# Altium PCB Soil_Moisture_Sensor - 副本.PcbDoc
Units mm, origin at the board's own origin, x right, y up, seen from the top; angles counter-clockwise.
Board outline 188.16 x 66 mm, 2 copper layers (Top Layer, Bottom Layer); 84 components, 58 nets, 298 pads, 19 vias.
Unrouted connection lines stored in the file: 207.
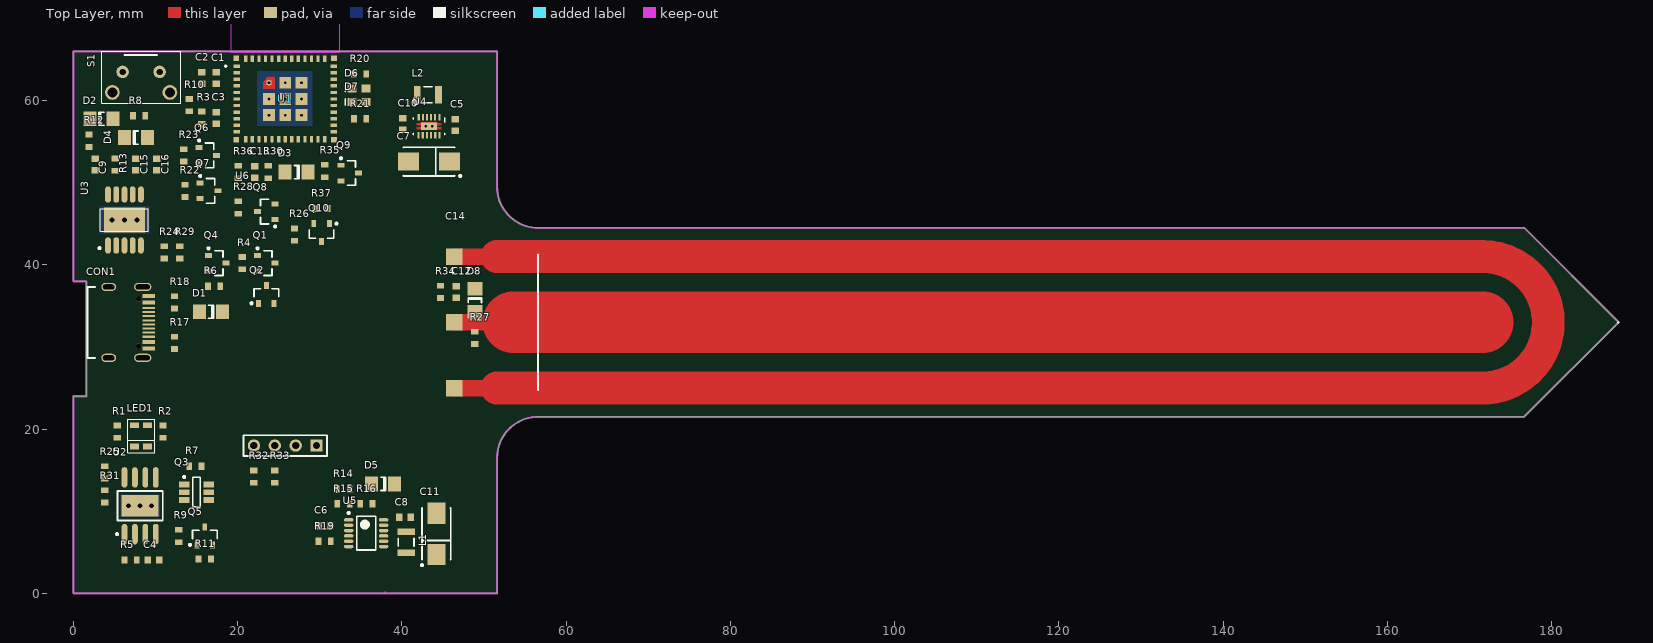
[diagram p0: Top Layer view]
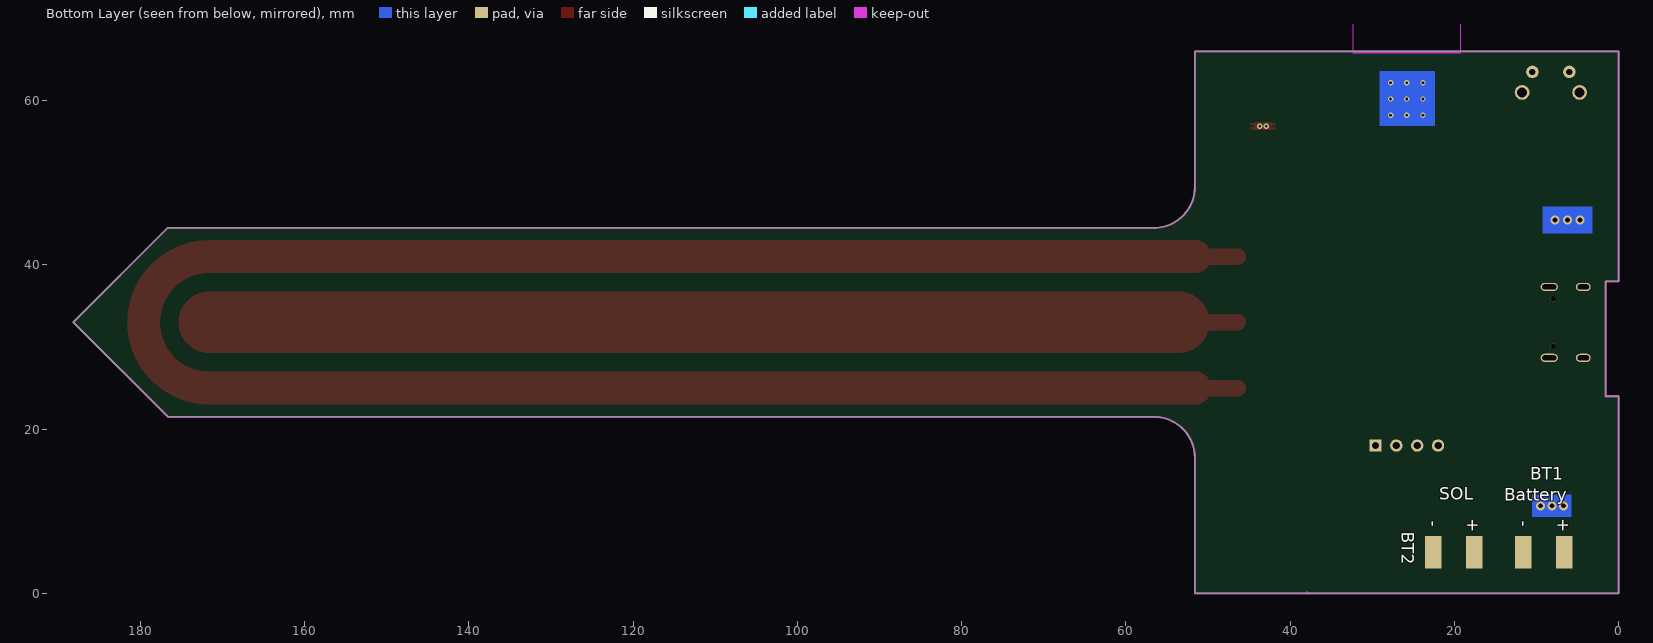
[diagram p1: Bottom Layer view, seen from below]

## Layer stack, top to bottom
Top Solder: solder mask 0.0102, Solder Resist, Dk 3.5
Top Layer: signal copper 0.0356
Dielectric 1: dielectric 0.32, FR-4, Dk 4.8
Bottom Layer: signal copper 0.0356
Bottom Solder: solder mask 0.0102, Solder Resist, Dk 3.5

## Board outline
0,0 0,24 1.6,24 1.6,38 0,38 0,66 51.6,66 51.6,49.5 ccw(c56.6,49.5) 56.6,44.5 176.683,44.5 188.163,33.02 176.643,21.5 176.6,21.5 56.6,21.5 ccw(c56.6,16.5) 51.6,16.5 51.6,0

## Design rules (kind name [scope] priority, off if disabled: settings)
Clearance Clearance_1 [HasFootprint('USB-TYPE_C')] p1: gap=0.1 ignorepadtopadclearanceinfootprint=TRUE
Clearance DSS0012A [HasFootprint('DSS0012A')] p2: gap=0.2 ignorepadtopadclearanceinfootprint=TRUE
Clearance [All] p3: gap=0.254 ignorepadtopadclearanceinfootprint=TRUE
ComponentClearance [All] p1: gap=0.254 collisioncheckmode=3 verticalgap=2540 showdistances=FALSE donotcheckwithout3dbody=TRUE
PolygonConnect [All] p1: connectstyle=Relief reliefconductorwidth=0.254 reliefentries=4 polygonreliefangle="90 Angle" airgapwidth=0.254
RoutingLayers RoutingLayers_EX_GND [InNet('GND')] p1: top layer_v5=FALSE bottom layer_v5=FALSE
RoutingLayers [All] p2: top layer_v5=TRUE bottom layer_v5=TRUE
RoutingVias [All] p1: holewidth=0.33 width=0.61 viastyle="Through Hole" minholewidth=0.33 minwidth=0.61 maxholewidth=0.33 maxwidth=0.61
SolderMaskExpansion [All] p1: expansion=0.102 istentingtop=FALSE
SupplyNets "Schematic Supply Nets_5" [InNet('GND')] p1: voltage=0.000
SupplyNets "Schematic Supply Nets_4" [InNet('GPIO10')] p2: voltage=0.000
SupplyNets "Schematic Supply Nets_3" [InNet('VIN')] p3: voltage=0.000
SupplyNets "Schematic Supply Nets_2" [InNet('VBAT')] p4: voltage=0.000
SupplyNets "Schematic Supply Nets_1" [InNet('VMCU')] p5: voltage=0.000
SupplyNets "Schematic Supply Nets" [InNet('VBUS')] p6: voltage=0.000
Width [All] p1: maxlimit=85 minlimit=0.254 preferedwidth=0.254
28 further rules are at their usual default settings.

## Components (designator, comment, footprint, x,y, rotation, side; value= is the part's Value field where it differs from the comment)
BT1 "Battery" BATTERY 26.6,33 r270 bottom
BT2 "SOL-Battery" BATTERY-SOL 26.6,33 r270 bottom
C1 "25V" CAPC1608L 17.399,62.738 r270 top value=106
C2 "50V" CAPC1608L 15.621,62.738 r270 top value=104
C3 "16V" CAPC1608L 17.399,57.9 r90 top value=105
C4 "25V" CAPC1608L 9.779,4.064 r0 top value=106
C5 "25V" CAPC1608L 46.482,57.023 r270 top value=106
C6 "25V" CAPC1608L 30.607,8.255 r180 top value=475
C7 "16V" TC6032-2412 43.307,52.578 r180 top value=107
C8 "25V" CAPC1608L 40.386,9.271 r0 top value=105
C9 "50V" CAPC1608L 2.667,52.197 r270 top value=104
C10 "25V" CAPC1608L 40.132,57.15 r270 top value=106
C11 "16V" TC6032-2412 44.196,7.239 r90 top value=107
C12 "50V" CAPC1608L 46.609,36.703 r270 top value=104
C13 "50V" CAPC1608L 22.098,51.308 r90 top value=104
C14 "CAP-SENSOR" CAP-SENSOR 51.6,33 r90 top locked
C15 "25V" CAPC1608L 7.62,52.197 r90 top value=106
C16 "50V" CAPC1608L 10.16,52.197 r90 top value=104
CON1 "USB-TYPEE_C" USB-TYPE_C 9,33 r270 top locked
D1 "1N4148" CD3216-1206 16.764,34.29 r0 top
D2 "1N4148" CD3216-1206 3.429,57.785 r180 top
D3 "1N4148" CD3216-1206 27.178,51.308 r0 top
D4 "1N4148" CD3216-1206 7.62,55.499 r180 top
D5 "1N4148" CD3216-1206 37.719,13.335 r0 top
D6 "Green" CD1608-0603 34.798,61.468 r180 top
D7 "Blue" CD1608-0603 34.798,59.817 r180 top
D8 "1N4148" CD3216-1206 48.895,35.687 r90 top
L1 "2A" INDC2520X06N 40.513,6.223 r270 top value=10uH
L2 "2A" INDC2520X06N 43.18,60.706 r0 top value=2.2uH
LED1 "RED_GREEN_LED" RED_GREEN_LED1206 8.255,19.177 r90 top
Q1 "AO3401,A19T" SOT-23B_L 23.495,40.209 r0 top
Q2 "AO3401,A19T" SOT-23B_L 23.495,36.399 r90 top
Q3 "AO6801" SOT95P330-6M 14.986,12.319 r0 top
Q4 "AO3400,A09T" SOT-23B_L 17.526,40.209 r0 top
Q5 "S8050,J3Y" SOT-23B_L 16.002,6.985 r90 top
Q6 "S8050,J3Y" SOT-23B_L 16.383,53.34 r0 top
Q7 "S8050,J3Y" SOT-23B_L 16.51,49.022 r0 top
Q8 "AO3401,A19T" SOT-23B_L 23.495,46.482 r180 top
Q9 "AO3401,A19T" SOT-23B_L 33.655,51.181 r0 top
Q10 "AO3400,A09T" SOT-23B_L 30.226,43.942 r270 top
R1 "Res1" RESC1608L 5.334,19.685 r270 top value=1K
R2 "Res1" RESC1608L 10.922,19.685 r270 top value=1K
R3 "Res1" RESC1608L 15.621,57.912 r270 top value=10K
R4 "" RESC1608L 20.574,40.209 r270 top value=1M
R5 "Res1" RESC1608L 6.985,4.064 r0 top value=1.2K
R6 "" RESC1608L 17.145,37.415 r0 top value=10K
R7 "" RESC1608L 14.859,15.494 r180 top value=10K
R8 "" RESC1608L 8.001,58.166 r180 top value=3.6K
R9 "" RESC1608L 12.827,6.985 r90 top value=4.7K
R10 "" RESC1608L 14.097,59.45 r90 top value=10K
R11 "" RESC1608L 16.002,4.191 r0 top value=10K
R12 "" RESC1608L 1.905,55.118 r90 top value=1M
R13 "Res1" RESC1608L 5.08,52.197 r270 top value=300R
R14 "" RESC1608L 32.893,12.7 r0 top value=330K
R15 "" RESC1608L 32.893,10.922 r0 top value=270K
R16 "" RESC1608L 35.687,10.922 r0 top value=1M
R17 "Res1" RESC1608L 12.319,30.5 r90 top value=5.1K
R18 "Res1" RESC1608L 12.319,35.433 r270 top value=5.1K
R19 "" RESC1608L 30.607,6.35 r0 top value=240K
R20 "Res1" RESC1608L 34.925,63.246 r0 top value=1K
R21 "Res1" RESC1608L 34.925,57.785 r0 top value=1K
R22 "Res1" RESC1608L 13.589,49.022 r270 top value=10K
R23 "Res1" RESC1608L 13.462,53.34 r270 top value=10K
R24 "" RESC1608L 11.049,41.529 r270 top value=3.6K
R25 "" RESC1608L 3.81,14.732 r90 top value=36K
R26 "" RESC1608L 26.924,43.688 r90 top value=10K
R27 "" RESC1608L 48.895,31.115 r270 top value=10K
R28 "" RESC1608L 20.066,46.99 r270 top value=10K
R29 "" RESC1608L 12.954,41.529 r90 top value=10K
R30 "" RESC1608L 23.749,51.308 r90 top value=1M
R31 "" RESC1608L 3.81,11.811 r90 top value=100K
R32 "Res1" RESC1608L 21.99,14.224 r90 top value=10K
R33 "Res1" RESC1608L 24.53,14.224 r90 top value=10K
R34 "" RESC1608L 44.704,36.703 r270 top value=1M
R35 "" RESC1608L 30.607,51.435 r270 top value=10K
R36 "" RESC1608L 20.066,51.308 r90 top value=10K
R37 "" RESC1608L 30.226,46.863 r0 top value=10K
S1 "Key" KEY 8.255,63.5 r0 top locked
U1 "ESP32-C3-MINI-1" XCVR_ESP32-C3-MINI-1-N4 25.8,60.2 r0 top locked
U2 "TP4056" SOP127P780-8M 8.128,10.668 r90 top
U3 "CH340K" ESOP100-10 6.223,45.466 r90 top
U4 "TPS62740" DSS0012A 43.307,56.896 r270 top
U5 "LTC3105" TSOP65P490X110-12L 35.653,7.325 r0 top
U6 "*OLED-128-32" OLED-128-32 25.8,18 r180 top locked

## Footprints (in the part's own frame and the unit in brackets; to place one, negate y for a bottom-side part, rotate by r counter-clockwise, add the part's x,y. Pads: shape width x height; smd on the part's side, far side on the other; paste and mask are expansions set on the pad)
BATTERY [mm] "BATTERY"
  rect 4x2 smd: 1(28,20) 2(28,15)
BATTERY-SOL [mm] "BATTERY"
  rect 4x2 smd: 1(28,9) 2(28,4)
CAP-SENSOR [mm] "CAP-SENSOR"
  rect 2x2 smd: 1(-8,5.2) 2(8,5.2) 3(0,5.2)
  Top Layer lines w2: -8,5.2 -8,0 ; 0,5.2 0,0 ; 8,5.2 8,0
  Top Layer lines w4: -8,0 -8,-120 ccw(c0,-120) 8,-120 8,0
  Top Layer lines w7.5: 0,-2 0,-120
  silkscreen extent -8.25,-136.53 8.25,-5
CAPC1608L [mm] "Chip Capacitor, Body 1.6x0.8mm, IPC High Density"
  rect 0.8x0.9 smd: 1(-0.7,0) 2(0.7,0)
  body extent -0.87,-0.48 0.87,0.48, height 0.85
CD1608-0603 [mm] "Chip Diode; Body 1.6 x 0.8 mm (LxW typ)"
  rect 1.1x1 smd: 1(-0.85,0) 2(0.85,0)
  silkscreen extent 1.7,-0.4 1.7,0.4
CD3216-1206 [mm] "Chip Diode; Body 3.2 x 1.6 mm (LxW typ)"
  rect 1.6x1.8 smd: 1(-1.4,0) 2(1.4,0)
  silkscreen extent -0.3,-0.8 0.3,0.8
DSS0012A [mm]
  rect 0.8x0.25 smd paste+0 mask+0.051: 1(-1.1,1.27) 2(-1.1,0.75) 3(-1.1,0.25) 4(-1.1,-0.25) 5(-1.1,-0.75) 6(-1.1,-1.25) 7(1.1,-1.27) 8(1.1,-0.762) 9(1.1,-0.254) 10(1.1,0.254) 11(1.1,0.762) 12(1.1,1.25)
  rect 0.9x2 smd paste-0.45 mask+0.051: 13(0,0)
  Top Layer region: -0.125,-1.5 -0.375,-1.5 -0.375,-1 -0.45,-1 -0.45,1 -0.375,1 -0.375,1.5 -0.125,1.5 -0.125,1 0.125,1 0.125,1.5 0.375,1.5 0.375,1 0.45,1 0.45,-1 0.375,-1 0.375,-1.5 0.125,-1.5 0.125,-1 -0.125,-1
  silkscreen extent -1.03,-1.91 1.04,1.91
ESOP100-10 [mm] "10-Pin Small Outline Package 1.00 mm Pitch and Pad"
  rect 3x5 smd: 0(0,0)
  oval 2x0.7 smd: 1(-3.1,2) 2(-3.1,1) 3(-3.1,0) 4(-3.1,-1) 5(-3.1,-2) 6(3.1,-2) 7(3.1,-1) 8(3.1,0) 9(3.1,1) 10(3.1,2)
  Bottom Layer region: -1.651,-3.048 1.651,-3.048 1.651,3.048 -1.651,3.048
  silkscreen extent -3.55,-2.92 1.4,3.17, body extent -2.85,-3.17 2.85,3.43, height 2.2
INDC2520X06N [mm] "Chip Inductor, 2-Leads, Body 2.50x2.00mm, IPC Medium Density"
  rect 0.8x2.14 smd: 1(-1.28,0) 2(1.28,0)
  silkscreen extent -0.5,-0.97 0.5,0.97, body extent -1.25,-1 1.25,1, height 0.6
KEY [mm]
  round 1.8 hole 1.2: 0(-3.5,-2.5) 0(3.5,-2.5)
  round 1.524 hole 0.762: 1(2.25,-0.007) 2(-2.25,0)
  silkscreen extent -4.83,-3.81 4.83,2.5
OLED-128-32 [mm]
  rect 1.5x1.5 hole 0.9: 1(-3.81,0)
  round 1.5 hole 0.9: 2(-1.27,0) 3(1.27,0) 4(3.81,0)
  silkscreen extent -5.08,-1.27 5.08,1.27
RED_GREEN_LED1206 [mm]
  rect 0.7x1.1 smd: 1(-1.3,0.8) 2(-1.3,-0.8) 3(1.3,-0.8) 4(1.3,0.8)
  silkscreen extent -2.03,-1.65 2.03,1.65
RESC1608L [mm] "Chip Resistor, Body 1.6x0.8mm, IPC High Density"
  rect 0.7x0.9 smd: 1(-0.75,0) 2(0.75,0)
  body extent -0.85,-0.48 0.85,0.48, height 0.6
SOP127P780-8M [mm] "SOP, 8-Leads, Body 5.3x5.3mm, Pitch 1.27mm, IPC Low Density"
  oval 2.5x0.7 smd: 1(-3.45,1.905) 2(-3.45,0.635) 3(-3.45,-0.635) 4(-3.45,-1.905) 5(3.45,-1.905) 6(3.45,-0.635) 7(3.45,0.635) 8(3.45,1.905)
  rect 2.6x4.5 smd: 9(0,0)
  Bottom Layer region: -1.397,-2.413 1.397,-2.413 1.397,2.413 -1.397,2.413
  silkscreen extent -3.57,-2.75 1.8,2.93, body extent -2.73,-2.75 2.73,2.75, height 2.03
SOT95P330-6M [mm]
  rect 1.3x0.7 smd: 1(-1.5,0.95) 2(-1.5,0) 3(-1.5,-0.95) 4(1.5,-0.95) 5(1.5,0) 6(1.5,0.95)
  silkscreen extent -1.62,-1.8 0.45,1.97, body extent -1.2,-1.8 1.2,1.8
SOT-23B_L [mm] "SOT23, 3-Leads, Body 2.9x1.3mm, Pitch 0.95mm, Lead Span 2.4mm, IPC High Density"
  rect 0.85x0.6 smd: 1(-1.075,0.95) 2(-1.075,-0.95) 3(1.075,0)
  silkscreen extent -1.2,-1.5 0.7,1.92, body extent -0.7,-1.5 0.7,1.5, height 1.14
TC6032-2412 [mm] "Capacitor, SM Tantalum; Body 6.0 x 3.2 mm (LxW typ)"
  rect 2.6x2.2 smd: 1(-2.5,0) 2(2.5,0)
  silkscreen extent -3.93,-1.75 3.15,1.87, body extent -3.05,-1.65 3.18,1.65, height 3
TSOP65P490X110-12L [mm] "TSOP, 12-Leads, Body 4.04x3.00mm, Pitch 0.65mm, IPC High Density"
  oval 1.15x0.42 smd: 1(-2.125,1.625) 2(-2.125,0.975) 3(-2.125,0.325) 4(-2.125,-0.325) 5(-2.125,-0.975) 6(-2.125,-1.625) 7(2.125,-1.625) 8(2.125,-0.975) 9(2.125,-0.325) 10(2.125,0.325) 11(2.125,0.975) 12(2.125,1.625)
  silkscreen extent -2.25,-2.05 1.15,2.57, body extent -1.55,-2.05 1.55,2.05, height 1.1
USB-TYPE_C [mm]
  oval 1x2.1 hole 0.6 slot 1.7 at 90 deg: 1(-4.32,-0.55) 1(4.32,-0.55)
  oval 1x1.8 hole 0.6 slot 1.4 at 90 deg: 1(-4.32,-4.7) 1(4.32,-4.7)
  rect 0.5x1.5 smd: 2(-3.2,0.2) 3(-2.4,0.2) 12(2.4,0.2) 13(3.2,0.2)
  rect 0.25x1.5 smd: 4(-1.75,0.2) 5(-1.25,0.2) 6(-0.75,0.2) 7(-0.25,0.2) 8(0.25,0.2) 9(0.75,0.2) 10(1.25,0.2) 11(1.75,0.2)
  silkscreen extent -4.32,-7.3 4.32,-6.35, body extent -4.32,-7.37 4.32,0.13, height 3.26
XCVR_ESP32-C3-MINI-1-N4 [mm]
  rect 0.8x0.4 smd: 1(-5.9,4) 2(-5.9,3.2) 3(-5.9,2.4) 4(-5.9,1.6) 5(-5.9,0.8) 6(-5.9,0) 7(-5.9,-0.8) 8(-5.9,-1.6) 9(-5.9,-2.4) 10(-5.9,-3.2) 11(-5.9,-4) 25(5.9,-4) 26(5.9,-3.2) 27(5.9,-2.4) 28(5.9,-1.6) 29(5.9,-0.8) 30(5.9,0) 31(5.9,0.8) 32(5.9,1.6) 33(5.9,2.4) 34(5.9,3.2) 35(5.9,4)
  rect 0.4x0.8 smd: 12(-4.8,-4.9) 13(-4,-4.9) 14(-3.2,-4.9) 15(-2.4,-4.9) 16(-1.6,-4.9) 17(-0.8,-4.9) 18(0,-4.9) 19(0.8,-4.9) 20(1.6,-4.9) 21(2.4,-4.9) 22(3.2,-4.9) 23(4,-4.9) 24(4.8,-4.9) 36(4.8,4.9) 37(4,4.9) 38(3.2,4.9) 39(2.4,4.9) 40(1.6,4.9) 41(0.8,4.9) 42(0,4.9) 43(-0.8,4.9) 44(-1.6,4.9) 45(-2.4,4.9) 46(-3.2,4.9) 47(-4,4.9) 48(-4.8,4.9)
  rect 1.45x1.45 smd: 49(-1.975,-1.975) 49(-1.975,0) 49(0,-1.975) 49(0,0) 49(0,1.975) 49(1.975,-1.975) 49(1.975,0) 49(1.975,1.975)
  rect 0.6x0.6 smd paste-1 mask+0: 49(-1.975,1.975)
  rect 0.7x0.7 smd: 50(5.95,4.95) 51(5.95,-4.95) 52(-5.95,-4.95) 53(-5.95,4.95)
  Top Layer region: -1.25,1.25 -2.7,1.25 -2.7,2.1 -2.1,2.7 -1.25,2.7
  Bottom Layer region: -3.429,-3.302 3.302,-3.302 3.302,3.429 -3.429,3.429
  Keep-Out Layer region: 6.6,5.6 -6.6,5.6 -6.6,11 6.6,11
  Keep-Out Layer region: 6.6,5.6 -6.6,5.6 -6.6,11 6.6,11
  silkscreen extent -7.35,3.9 -7.15,4.1

## Part data
BT1: "Multicell Battery", LatestRevisionDate=17-Jul-2002, LatestRevisionNote="Re-released for DXP Platform.", PackageDescription="Battery; 2 Leads", PackageReference=BAT-2, Published=24-Mar-1999, Publisher="Altium Limited"
BT2: library part Battery, "Multicell Battery", LatestRevisionDate=17-Jul-2002, LatestRevisionNote="Re-released for DXP Platform.", PackageDescription="Battery; 2 Leads", PackageReference=BAT-2, Published=24-Mar-1999, Publisher="Altium Limited"
C1 C2 C3 C4 C5 C6 C8 C9 C10 C12 C13 C15 C16: library part Cap, "Capacitor", LatestRevisionDate=17-Jul-2002, LatestRevisionNote="Re-released for DXP Platform.", PackageDescription="Radial Cap, Thru-Hole; 2 Leads; 0.3 in Pin Spacing", PackageReference=RAD-0.3, Published=8-Jun-2000, Publisher="Altium Limited"
C7 C11: library part "Cap Pol1", "Polarized Capacitor (Radial)", LatestRevisionDate=17-Jul-2002, LatestRevisionNote="Re-released for DXP Platform.", PackageDescription="Polarized Capacitor (Radial); 2 Leads", PackageReference=RB7.6-15, Published=8-Jun-2000, Publisher="Altium Limited"
D1 D2 D3 D4 D5 D8: library part Diode, "Default Diode", Code_JEDEC=DO-214-AB, LatestRevisionDate=17-Jul-2002, LatestRevisionNote="Re-released for DXP Platform.", PackageDescription="DO-214-AB/SMC; 2 C-Bend Leads; Body 7.9 x 5.9 mm, inc. leads (LxW)", PackageReference=SMC, PackageVersion=Sep-1996, Published=8-Jun-2000, Publisher="Altium Limited"
D6 D7: library part LED0, "Typical INFRARED GaAs LED", LatestRevisionDate=08-Jul-2005, LatestRevisionNote="Mech Layer 1 removed.", PackageDescription="LED; 2 Leads", PackageReference=LED-0, Published=8-Jun-2000, Publisher="Altium Limited"
L1 L2: library part Inductor, "Inductor", Code_IEC=1005, Code_JEITA=0402, LatestRevisionDate=29-May-2009, LatestRevisionNote="IPC-7351 Footprint Added.", PackageDescription="Chip Inductor", PackageReference=0402-A, Published=8-Jun-2000, Publisher="Altium Limited"
Q1 Q2 Q8 Q9: library part PMOS-2, "P-Channel Power MOSFET", ComponentLink1Description="Manufacturer Link", ComponentLink1URL=http://www.irf.com/, DatasheetVersion=PD-9.390D, LatestRevisionDate=17-Jul-2002, LatestRevisionNote="Re-released for DXP Platform.", Note="Pin 4 not drawn and electrically connected to Pin 2.", PackageDescription="TO, Thru-Hole, Vertical, Heatsink Mounted; 3 In-Line Leads; Pitch 2.54 mm", PackageReference=TO-220AB, PackageVersion=Feb-1997, Published=8-Jun-2000, Publisher="Altium Limited"
Q4 Q10: library part NMOS-2, "N-Channel Power MOSFET", ComponentLink1Description="Manufacturer Link", ComponentLink1URL=http://www.irf.com/, DatasheetVersion=PD-9.814, LatestRevisionDate=17-Jul-2002, LatestRevisionNote="Re-released for DXP Platform.", Note="Pin 2 is electrically connected to pin 4.", PackageDescription="TO, Thru-Hole, Vertical, Heatsink Mounted; 3 In-Line Leads; Pitch 2.54 mm", PackageReference=TO-220AB, PackageVersion=Feb-1997, Published=8-Jun-2000, Publisher="Altium Limited"
Q5 Q6 Q7: library part NPN, "NPN Bipolar Transistor", Code_JEDEC=TO-226-AA, LatestRevisionDate=17-Jul-2002, LatestRevisionNote="Re-released for DXP Platform.", PackageDescription="TO, Flat Index; 3 In-Line, Axial Leads; Body Dia. 4.8mm; Leads 0.55 x 0.51 mm (max)", PackageReference=TO-226-AA, Published=8-Jun-2000, Publisher="Altium Limited"
R1 R2 R3 R5 R13 R17 R18 R20 R21 R22 R23 R32 R33: "Resistor", LatestRevisionDate=17-Jul-2002, LatestRevisionNote="Re-released for DXP Platform.", PackageDescription="Axial Device, Thru-Hole; 2 Leads; 0.3 in Pin Spacing", PackageReference=AXIAL-0.3, Published=8-Jun-2000, Publisher="Altium Limited"
R4 R6 R7 R8 R9 R10 R11 R12 R14 R15 R16 R19 R24 R25 R26 R27 R28 R29 R30 R31 R34 R35 R36 R37: library part Res1, "Resistor", LatestRevisionDate=17-Jul-2002, LatestRevisionNote="Re-released for DXP Platform.", PackageDescription="Axial Device, Thru-Hole; 2 Leads; 0.3 in Pin Spacing", PackageReference=AXIAL-0.3, Published=8-Jun-2000, Publisher="Altium Limited"
S1: library part SW-SPST, "Single-Pole, Single-Throw Switch", LatestRevisionDate=17-Jul-2002, LatestRevisionNote="Re-released for DXP Platform.", PackageDescription="Switch; 2 Leads", PackageReference=SPST-2, Published=24-Mar-1999, Publisher="Altium Limited"
U6: library part OLED-128-32, "OLED-128-32"

## Via types
v1: diameter 0.66, hole 0.33, Top Layer to Bottom Layer, 11 vias
v2: diameter 1.1, hole 0.6, Top Layer to Bottom Layer, 6 vias
v3: diameter 0.65, hole 0.65, Top Layer to Bottom Layer, 2 vias

## Nets (pads, with @x,y where several pads share a name; then routed paths per layer and width w, separated by ;. In a path a pad name is that pad's centre, name@x,y a point inside that pad or via, vN(x,y) a via of type N, cw(c..) or ccw(c..) an arc to the next point about the centre after c; other vN are vias at no path point)
CHIP_PU: C3.2 Q6.3 R3.1 U1.8
DTR: Q7.2 R22.2 U3.4
GND: BT1.2 BT2.2 C1.1 C2.1 C3.1 C4.1 C5.1 C6.2 C7.2 C8.2 C9.1 C10.2 C11.2 C12.1 C13.1 C14.1 C14.2 C15.2 C16.2 CON1.1 CON1.2 CON1.13 Q4.2 Q5.2 Q10.2 R5.1 R6.1 R10.1 R11.2 R12.1 R14.2 R17.1 R18.1 R19.1 R29.1 R30.1 R31.1 R34.1 R36.1 R37.1 U1.1 U1.2 U1.11 U1.14 U1.36 U1.37 U1.38 U1.39 U1.40 U1.41 U1.42 U1.43 U1.44 U1.45 U1.46 U1.47 U1.48 U1.49 U1.50 U1.51 U1.52 U1.53 U2.1 U2.3 U2.9 U3.0 U3.3 U4.3 U4.4 U4.13 U5.3 U5.6 U5.7 U6.1
  other v1: 42.926,56.896 43.688,56.896 23.825,58.225 25.8,58.225 27.775,58.225 23.825,60.2 25.8,60.2 27.775,60.2 23.825,62.175 25.8,62.175 27.775,62.175
  other v2: 6.731,10.668 8.128,10.668 9.525,10.668 4.699,45.466 6.223,45.466 7.747,45.466
GPIO0: C13.2 R28.1 R36.2 U1.12
GPIO1: C12.2 D8.2 R34.2 U1.13
GPIO2: R27.2 U1.5
GPIO3: R8.1 R10.2 U1.6
GPIO4: R24.1 R29.2 U1.18
GPIO5: D3.1 U1.19
GPIO6: Q10.1 R37.2 U1.20
GPIO7: LED1.2 R25.1 R31.2 U1.21 U2.6
GPIO8: Q9.1 R35.1 U1.22
GPIO9: U1.23
GPIO10: C6.1 R30.2 U1.16 U5.2
GPIO18: R33.2 U1.26 U6.3
GPIO19: Q7.3 R32.2 U1.27 U6.4
NetBT2_1: BT2.1 C11.1 L1.2 U5.4 U5.8
NetC8_1: C8.1 U5.12
NetC9_2: C9.2 U3.10
NetC14_3: C14.3 D8.1 R27.1
NetCON1_5: CON1.5 R18.2
NetCON1_6: CON1.6 CON1.8 U3.2
NetCON1_7: CON1.7 CON1.9 U3.1
NetCON1_11: CON1.11 R17.2
NetD2_1: D2.1 R8.2 S1.1
NetD2_2: D2.2 D3.2 Q4.1 R12.2
NetD4_2: D4.2 U3.8
NetD5_1: D5.1 R16.2 U5.11
NetD6_1: D6.1 R20.2
NetD7_1: D7.1 R21.2
NetL1_1: L1.1 U5.9
NetL2_2: L2.2 U4.2
NetLED1_1: LED1.1 U2.7
NetLED1_3: LED1.3 R2.1
NetLED1_4: LED1.4 R1.1
NetQ1_1: Q1.1 Q4.3 R4.1
NetQ1_3: Q1.3 Q2.3
NetQ3_1: Q3.1 Q3.3 Q5.3 R7.2
NetQ3_2: Q3.2 Q3.5 R7.1
NetQ3_6: Q3.6 U2.5
NetQ5_1: Q5.1 R9.1 R11.1
NetQ6_1: Q6.1 R22.1
NetQ7_1: Q7.1 R23.1
NetQ8_1: Q8.1 Q10.3 R26.1
NetQ8_3: Q8.3 R28.2
NetQ9_3: Q9.3 R32.1 R33.1 U6.2
NetR5_2: R5.2 U2.2
NetR13_2: R13.2 U3.9
NetR14_1: R14.1 R15.1 U5.1
NetR15_2: R15.2 R16.1
NetR19_2: R19.2 U5.5
RTS: Q6.2 R23.2 U3.6
RXD0: D4.1 D7.2 U1.30
TXD0: D6.2 R13.1 U1.31
VBAT: BT1.1 D5.2 Q1.2 Q3.4 Q8.2 R4.2 R26.2 S1.2
VBUS: C4.2 C15.1 C16.1 CON1.3 CON1.12 D1.1 Q2.1 R1.2 R2.2 R6.2 R9.2 R24.2 R25.2 U2.4 U2.8 U3.7
VIN: C5.2 C7.1 D1.2 Q2.2 U4.1 U4.8 U4.9 U4.10 U4.11 U4.12
VMCU: C1.2 C2.2 C10.1 L2.1 Q9.2 R3.2 R20.1 R21.1 R35.2 U1.3 U4.5
pads on no net: CON1.4 CON1.10 S1.0 U1.4 U1.7 U1.9 U1.10 U1.15 U1.17 U1.24 U1.25 U1.28 U1.29 U1.32 U1.33 U1.34 U1.35 U3.5 U4.6 U4.7 U5.10
copper on no net:
  other v3: 7.95,30.11 7.95,35.89

## Keep-outs
Keep-Out Layer:
  lines w0.254: 0,24 1.6,24 ; 0,24.003 0,0 51.6,0 51.6,16.5 cw(c56.6,16.5) 56.6,21.5 176.6,21.5 176.643,21.5 188.163,33.02 176.683,44.5 ; 1.6,24.003 1.6,38 0,38 0,66 51.6,66 51.6,49.5 ccw(c56.6,49.5) 56.6,44.5 176.6,44.5 ; 37.916,0.127 37.999,0.127 37.916,0.127

## Silkscreen, mask and mechanical layers (free items; w line width, h text height)
Mechanical 15:
  lines w0.254: 0,25.4 12,25.4 ; 0,33.003 0,24.003 ; 0,38 0,33 45.339,33 ; 0,24.003 12,24.003 12,26.797 0,26.797 0,24.003

## Text inside footprints (layer, text, board x,y; h text height)
BT1: Bottom Overlay "-" at 12.249,8.87 h1.52 r90; Bottom Overlay "+" at 7.423,9.124 h1.52 r90
BT2: Bottom Overlay "SOL" at 21.821,11.41 h1.52; Bottom Overlay "-" at 23.249,8.87 h1.52 r90; Bottom Overlay "+" at 18.423,9.124 h1.52 r90
U6: Mechanical 15 "OLED 128X32" at 26.545,26.89 h1.52 r90; Mechanical 15 "SDA" at 22.862,19.524 h1.52 r90; Mechanical 15 "SCL" at 25.402,19.524 h1.52 r90; Mechanical 15 "Vcc" at 27.944,19.525 h1.52 r90; Mechanical 15 "Gnd" at 30.609,19.524 h1.52 r90